# EAGLE board test1 (EAGLE 9.2.0)

No outline drawn. Coordinates in mm, seen from the top.
Copper layers (1*16): Top 0.035mm / dielectric 1.5mm / Bottom 0.035mm
Design rules "default": minimum track width 6mil, minimum drill 0.35mm, track to track 6mil, track to pad 6mil, pad to pad 6mil, via to via 6mil, smd to smd 6mil, copper to edge 40mil, drill to drill 6mil, minimum pad ring 10mil, minimum via ring 8mil, stop-mask expansion 4mil, vias tented up to drill 0mil, thermal gap 10mil

## Footprints (pad centres in the part's own frame; a part is rotated, then mirrored left to right if it is on the bottom)
SO08 = smd 0.6 x 2.2: 1 -1.905,-2.6; 2 -0.635,-2.6; 3 0.635,-2.6; 4 1.905,-2.6; 5 1.905,2.6; 6 0.635,2.6; 7 -0.635,2.6; 8 -1.905,2.6
C1210 = smd 1.6 x 2.7: 1 -1.4,0; 2 1.4,0
AK500/5-H = drill 1.321 long: 1 -10.033,0; 2 -5.004,0; 3 0,0; 4 5.004,0; 5 10.008,0
AK500/3-H = drill 1.321 long: 1 -5.004,0; 2 0,0; 3 5.004,0
R1206 = smd 1.6 x 1.803: 1 -1.422,0; 2 1.422,0

## Placement (x,y rotation side)
A  .  [SO08]  -26.67,-99.06 0 top
B  .  [SO08]  -36.83,-99.06 0 top
C  .  [SO08]  -16.51,-99.06 0 top
C3  [C1210]  -1.4,-214.63 0 top
C5  [C1210]  -1.4,-227.33 0 top
C6  [C1210]  -1.4,-278.13 0 top
C7  [C1210]  -1.4,-316.23 0 top
C9  [C1210]  -1.4,-265.43 0 top
C11  [C1210]  -1.4,-290.83 0 top
C13  [C1210]  -1.4,-303.53 0 top
C20  [C1210]  -1.4,-252.73 0 top
C22  [C1210]  -1.4,-240.03 0 top
D  .  [SO08]  -46.99,-99.06 0 top
O  [AK500/5-H]  -38.1,-166.37 0 top
P  [AK500/3-H]  -43.18,-180.34 0 top
R1  [R1206]  -8.89,-29.21 0 top
R2  [R1206]  -8.89,-34.29 0 top
R4  [R1206]  -8.89,-57.15 0 top
R8  [R1206]  -8.89,-77.47 0 top
R10  [R1206]  -8.89,-87.63 0 top
R12  [R1206]  -8.89,-97.79 0 top
R14  [R1206]  -48.26,-113.03 0 top
R15  [R1206]  -48.26,-107.95 0 top
R16  [R1206]  -48.26,-118.11 0 top
R17  [R1206]  -48.26,-123.19 0 top
R18  [R1206]  -48.26,-128.27 0 top
R19  [R1206]  -48.26,-133.35 0 top
R21  [R1206]  -48.26,-143.51 0 top
R23  [R1206]  -48.26,-153.67 0 top
R24  [R1206]  -48.26,-158.75 0 top
R25  [R1206]  -48.26,-191.77 0 top
R26  [R1206]  -48.26,-196.85 0 top
R27  [R1206]  -48.26,-201.93 0 top
R28  [R1206]  -48.26,-321.31 0 top

## Library data of the parts
A B C D = linear
C3 C5-C7 C9 C11 C13 C20 C22 = rcl; SPICEPREFIX: C
O P = con-ptr500; OC_FARNELL: unknown; OC_NEWARK: unknown
R1 R2 R4 R8 R10 R12 R14-R19 R21 R23-R28 = eagle-ltspice; SPICEMODEL: NONE; SPICEPREFIX: R

## Nets
N$1: P.1 R1.2 R2.1
N$2: C3.1 R2.2
N$3: C3.2 C5.1 D.3 R4.1
N$4: C11.2 C13.2 R12.1
N$5: O.1 R14.1
N$6: C7.2 C.3 R16.2
N$7: C5.2 C7.1 C9.1 R4.2 R8.1
N$8: C.2 R8.2 R10.1
N$9: C11.1 C.6 R10.2
N$10: B.3 C13.1 R26.2
N$11: B.6 R12.2 R14.2 R17.2
N$12: B.2 R17.1
N$13: D.6 R15.2 R16.1
N$14: D.2 P.3 R15.1 R18.2 R19.1 R28.1
N$15: C20.1 R19.2
N$16: C20.2 C22.1 R21.1
N$17: A.3 C22.2 R21.2
N$18: R25.2 R26.1
N$19: A.2 R23.1
N$20: A.6 R23.2 R24.1 R28.2
N$21: P.2 R27.1
N$22: O.4 R27.2
V+: A.7 B.7 C.7 D.7
V-: A.4 B.4 C.4 D.4
VCC: C6.1 C6.2 O.2 O.3

## Tracks (layer width: path | path; a pad name or v marks a point on that pad's centre or on a via)
N$1  (2 unrouted)
N$2  (1 unrouted)
N$3  (3 unrouted)
N$4  (2 unrouted)
N$5  (1 unrouted)
N$6  (2 unrouted)
N$7  (4 unrouted)
N$8  (2 unrouted)
N$9  (2 unrouted)
N$10  (2 unrouted)
N$11  (3 unrouted)
N$12  (1 unrouted)
N$13  (2 unrouted)
N$14  (5 unrouted)
N$15  (1 unrouted)
N$16  (2 unrouted)
N$17  (2 unrouted)
N$18  (1 unrouted)
N$19  (1 unrouted)
N$20  (3 unrouted)
N$21  (1 unrouted)
N$22  (1 unrouted)
V+  (3 unrouted)
V-  (3 unrouted)
VCC  (3 unrouted)